# EAGLE board nintendac (EAGLE 7.7.0)
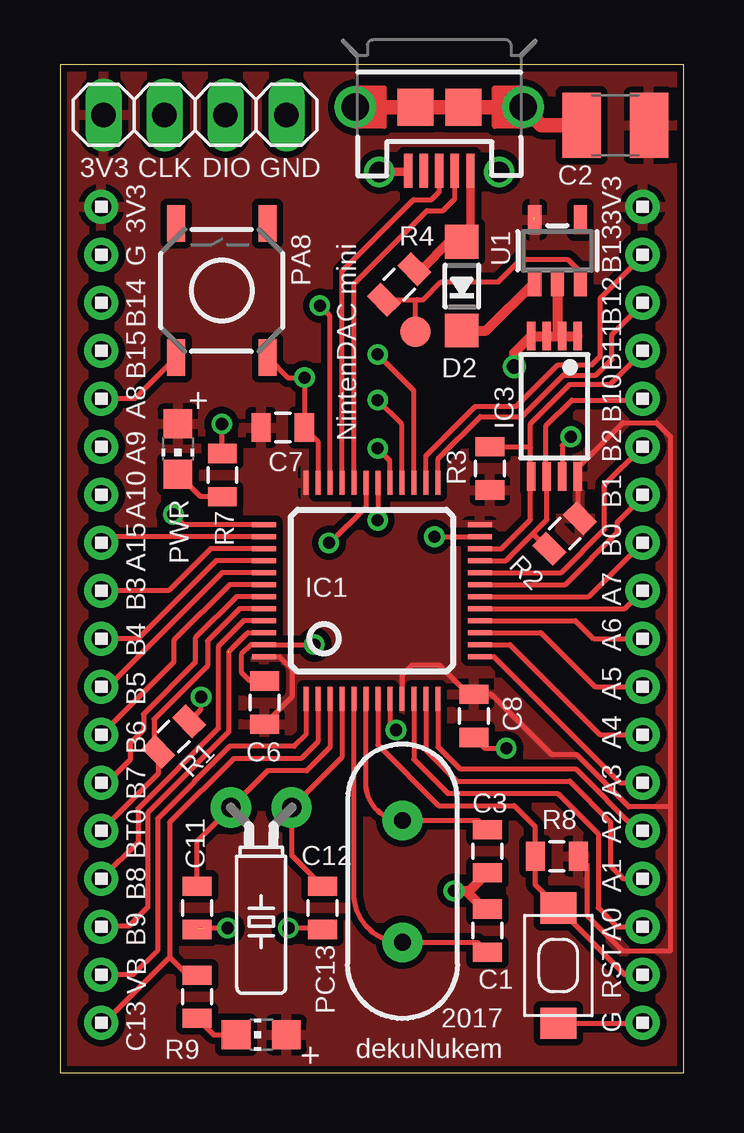
[diagram p0: board, top side]
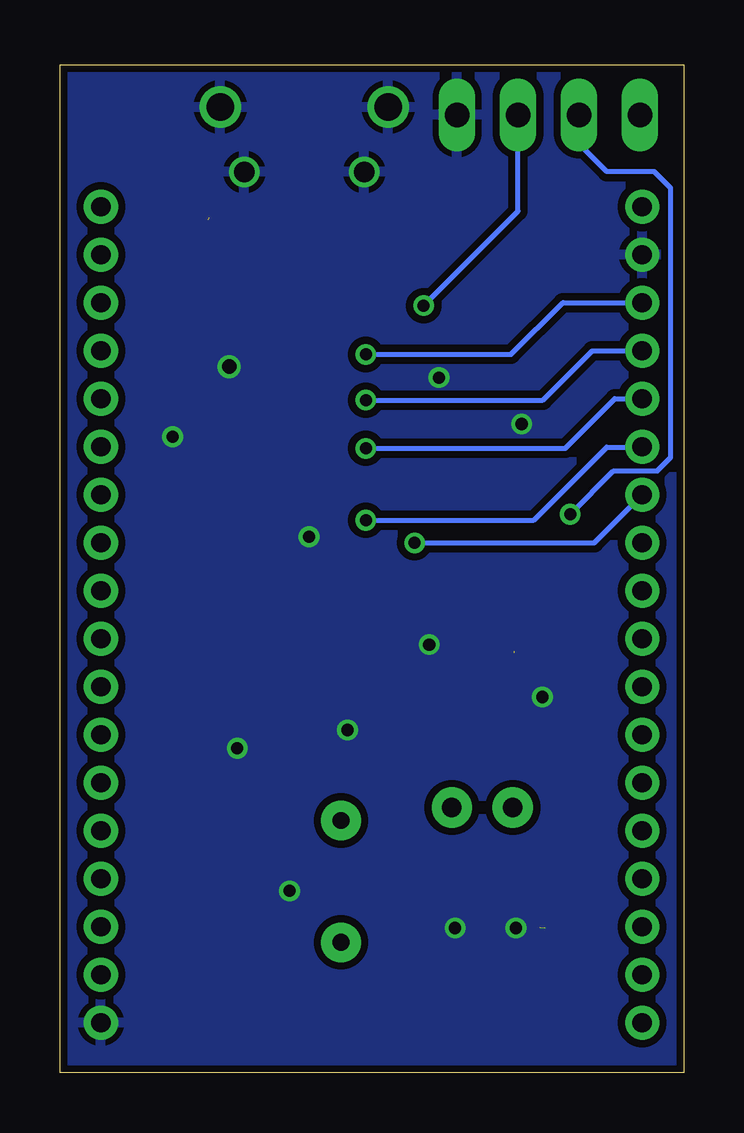
[diagram p1: board, bottom side, seen from below]

Size 26 x 42 mm. Coordinates in mm from the lower left corner, seen from the top.
Outline: 0,0 26,0 26,42 0,42 0,0
Copper layers (1*16): Top 0.035mm / dielectric 1.5mm / Bottom 0.035mm
Design rules "SparkFun-2-layer-TIGHT": minimum track width 7mil, minimum drill 15mil, track to track 7mil, track to pad 7mil, pad to pad 7mil, via to via 7mil, smd to smd 7mil, copper to edge 7mil, drill to drill 7mil, minimum pad ring 7mil, minimum via ring 7mil, stop-mask expansion 4mil, vias tented up to drill 25mil, thermal gap 10mil

## Footprints (pad centres in the part's own frame; a part is rotated, then mirrored left to right if it is on the bottom)
0805 = smd 0.8 x 1.2: 1 -0.9,0; 2 0.9,0
C1210 = smd 1.6 x 2.7: 1 -1.4,0; 2 1.4,0
SOD-123 = smd 1.4 x 1.4: A 1.85,0; C -1.85,0
TQFP48 = smd 0.2 x 1: 1 -2.75,-4.5; 2 -2.25,-4.5; 3 -1.75,-4.5; 4 -1.25,-4.5; 5 -0.75,-4.5; 6 -0.25,-4.5; 7 0.25,-4.5; 8 0.75,-4.5; 9 1.25,-4.5; 10 1.75,-4.5; 11 2.25,-4.5; 12 2.75,-4.5; 25 2.75,4.5; 26 2.25,4.5; 27 1.75,4.5; 28 1.25,4.5; 29 0.75,4.5; 30 0.25,4.5; 31 -0.25,4.5; 32 -0.75,4.5; 33 -1.25,4.5; 34 -1.75,4.5; 35 -2.25,4.5; 36 -2.75,4.5 | smd 1 x 0.2: 13 4.5,-2.75; 14 4.5,-2.25; 15 4.5,-1.75; 16 4.5,-1.25; 17 4.5,-0.75; 18 4.5,-0.25; 19 4.5,0.25; 20 4.5,0.75; 21 4.5,1.25; 22 4.5,1.75; 23 4.5,2.25; 24 4.5,2.75; 37 -4.5,2.75; 38 -4.5,2.25; 39 -4.5,1.75; 40 -4.5,1.25; 41 -4.5,0.75; 42 -4.5,0.25; 43 -4.5,-0.25; 44 -4.5,-0.75; 45 -4.5,-1.25; 46 -4.5,-1.75; 47 -4.5,-2.25; 48 -4.5,-2.75
TSSOP8 = smd 0.35 x 1.2: 1 -0.975,-2.925; 2 -0.325,-2.925; 3 0.325,-2.925; 4 0.975,-2.925; 5 0.975,2.925; 6 0.325,2.925; 7 -0.325,2.925; 8 -0.975,2.925
1X04 = drill 1.016 long: 1 -3.81,0; 2 -1.27,0; 3 1.27,0; 4 3.81,0
CHIP-LED0805 = smd 1.2 x 1.2: A 0,-1.05; C 0,1.05
KMR2 = smd 1.3 x 1.5: 1 2.4,0; 3 -2.4,0
TACTILE-SWITCH-SMD = smd 1.524 x 0.762: 1 -2.794,1.905; 2 2.794,1.905; 3 -2.794,-1.905; 4 2.794,-1.905
PAD.03X.05 = smd 1.27 x 1.27: P$1 0,0
SOT23-5 = smd 0.55 x 1.2: 1 -0.95,-1.3; 2 0,-1.3; 3 0.95,-1.3; 4 0.95,1.3; 5 -0.95,1.3
1X18 = drill 0.8 pad 1.422: 1 -9,0; 2 -7,0; 3 -5,0; 4 -3,0; 5 -1,0; 6 1,0; 7 3,0; 8 5,0; 9 7,0; 10 9,0; 11 11,0; 12 13,0; 13 15,0; 14 17,0; 15 19,0; 16 21,0; 17 23,0; 18 25,0
USB-MICROB = smd 0.35 x 1.4: D+ 0,2.65; D- -0.65,2.65; GND 1.3,2.65; ID 0.65,2.65; VBUS -1.3,2.65 | smd 1.5 x 1.55: P1 -1,0; P2 1,0 | drill 1.15 pad 1.422: P3 -3.5,0; P4 3.5,0 | drill 0.85 pad 1.27: P5 -2.5,2.7; P6 2.5,2.7
HC49US = drill 0.7 pad 1.651: 1 -2.54,0; 2 2.54,0
TC26HEZ = drill 0.813 pad 1.676: 1 -1.27,0; 2 1.27,0

## Placement (x,y rotation side)
C1  [0805]  17.82,5.92 90 top
C2  [C1210]  23.16,39.47 180 top
C3  [0805]  17.82,9.22 270 top
C6  [0805]  8.53,15.42 90 top
C7  [0805]  9.29,26.87 0 top
C8  [0805]  17.26,14.86 270 top
C11  [0805]  5.71,6.86 270 top
C12  [0805]  10.95,6.86 270 top
D2  MBR120  [SOD-123]  16.75,32.77 90 top
IC1  STM32F10XCXT6  [TQFP48]  13.01,20.08 0 top
IC3  24C64ST  [TSSOP8]  20.62,27.76 180 top
JP1  [1X04]  5.63,39.9 180 top
LED2  [CHIP-LED0805]  8.39,1.57 90 top
PWR  [CHIP-LED0805]  4.92,25.98 180 top
R1  [0805]  4.74,14 225 top
R2  [0805]  21.05,22.45 45 top
R3  [0805]  17.92,25.17 270 top
R4  [0805]  14.14,32.84 45 top
R7  [0805]  6.77,24.89 270 top
R8  [0805]  20.72,9.02 0 top
R9  [0805]  5.71,3.16 90 top
S1  SWITCH-MOMENTARY-2TURTLE  [KMR2]  20.78,4.46 90 top
S2  TAC_SWITCHSMD  [TACTILE-SWITCH-SMD]  6.75,32.59 90 top
TP1  TEST-POINT3X5  [PAD.03X.05]  14.82,30.86 0 top
U1  [SOT23-5]  20.74,34.24 0 top
U$1  1X18  [1X18]  1.73,27.08 270 top
U$2  1X18  [1X18]  24.29,27.08 270 top
X1  USB-MICROB  [USB-MICROB]  15.81,40.22 180 top
Y1  [HC49US]  14.28,7.97 270 top
Y2  [TC26HEZ]  8.39,11.04 180 top

## Library data of the parts
C1-C3 C6-C8 C11 C12 LED2 PWR Y1 Y2 = backplane
D2 = microbuilder
IC1 = stm32f072c8t6
IC3 = microchip; MPN: CAT24C64YI-GT3; OC_FARNELL: 1718133; OC_NEWARK: 08R5418
JP1 = pinhead
R1-R4 R7-R9 TP1 = SparkFun-Passives
S1 U1 = Adafruit Feather M0 Adalogger
S2 = SparkFun-Retired; PROD_ID: SWCH-08247
U$1 U$2 = headers(2mm)
X1 = backplane; PROD_ID: CONN-09505

## Nets
+3V3: C2.1 C6.1 C7.1 C8.1 IC1.9 IC1.24 IC1.36 IC1.48 IC3.8 JP1.4 LED2.A PWR.A R2.2 R3.2 R8.2 U1.5 U$1.1 U$2.1
GND: C1.2 C2.2 C3.2 C6.2 C7.2 C8.2 C11.2 C12.2 IC1.8 IC1.23 IC1.35 IC1.47 IC3.1 IC3.2 IC3.3 IC3.4 IC3.7 JP1.1 R1.1 R7.1 S1.3 S2.3 U1.2 U$1.2 U$2.18 X1.GND X1.P1 X1.P2 X1.P3 X1.P4 X1.P5 X1.P6
N$1: IC1.7 R8.1 S1.1 U$2.17
N$2: D2.A R4.2 X1.VBUS
N$3: IC1.44 R1.2 U$1.14
N$4: IC1.33 X1.D+
N$5: C1.1 IC1.5 Y1.2
N$6: C3.1 IC1.6 Y1.1
N$7: IC1.32 X1.D-
N$8: IC1.34 JP1.2
N$9: IC1.37 JP1.3
N$10: IC1.10 U$2.16
N$11: IC1.11 U$2.15
N$12: IC1.12 U$2.14
N$13: IC1.13 U$2.13
N$14: IC1.14 U$2.12
N$15: IC1.15 U$2.11
N$16: IC1.16 U$2.10
N$17: IC1.17 U$2.9
N$18: IC1.21 IC3.6 R2.1 U$2.5
N$19: IC1.22 IC3.5 R3.1 U$2.4
N$20: IC1.18 U$2.8
N$21: IC1.19 U$2.7
N$22: IC1.20 U$2.6
N$23: IC1.43 U$1.13
N$24: IC1.42 U$1.12
N$25: IC1.41 U$1.11
N$26: IC1.40 U$1.10
N$27: PWR.C R7.2
N$28: C11.1 IC1.3 Y2.2
N$29: C12.1 IC1.4 Y2.1
N$30: IC1.39 U$1.9
N$31: D2.C U1.1
N$32: IC1.2 R9.2 U$1.18
N$33: IC1.1 U$1.17
N$34: IC1.46 U$1.16
N$35: IC1.45 U$1.15
N$36: R4.1 TP1.P$1 U1.3
N$38: IC1.25 U$2.3
N$39: IC1.26 U$2.2
N$40: IC1.38 U$1.8
N$41: IC1.31 U$1.7
N$42: IC1.30 U$1.6
N$43: IC1.29 S2.1 U$1.5
N$44: IC1.27 U$1.3
N$45: IC1.28 U$1.4
N$65: LED2.C R9.1

## Tracks (layer width: path | path; a pad name or v marks a point on that pad's centre or on a via)
+3V3  (1 unrouted)
  Top 0.203: 8.53,17.31 IC1.48 9.16,17.33 9.67,16.82 9.67,15.66 C6.1 | IC1.9 14.27,16.56 14.67,16.97 15.81,16.97 17.02,15.76 C8.1 17.99,15.76 20.51,13.23 21.55,13.23 23.71,11.07 25.45,11.07 | R2.2 21.59,23.18 IC3.8 21.59,25.2 23.47,27.08 24.87,27.08 25.45,26.49 25.45,11.07 | R8.2 21.97,8.66 21.97,6.55 23.44,5.08 25.45,5.08 25.45,11.07
  Top 0.406: 19.78,35.41 19.78,35.61
  pour Top (isolate 0.279): 0,41.91 25.98,42 25.98,0 0,0
GND  (via drill 0.51, 0.6)  (1 unrouted)
  Top 0.203: C6.2 8.51,16.33 7.92,16.33 7.56,16.69 7.56,17.42 7.96,17.83 IC1.47 v10.6,17.83 v10.61,17.83 | IC1.35 10.76,26.3 C7.2 10.2,26.89 v10.2,28.96 9.49,28.96 S2.3 | IC1.8 13.76,14.53 v14.01,14.28 | C8.2 17.71,13.51 v18.61,13.51 | v15.61,22.33 IC1.23 | v6.75,27.03 6.75,25.82 R7.1 | S1.3 24.28,2.06 U$2.18 | 6,6.03 6.01,6.02 | C12.2 10.89,6.02 v9.53,6.02 | v6.99,6.02 5.78,6.02 C11.2 | v21.3,26.49 20.94,26.13 IC3.7 | R1.1 5.88,15.14 v5.88,15.65
  Top 0.356: X1.P6 14.46,37.52 X1.GND
  Top 0.406: v16.42,7.57 16.93,7.57 | 16.93,7.57 17.07,7.57 C3.2 | C1.2 17.68,6.82 16.93,7.57 | IC3.2 IC3.3 IC3.4 18.94,29.99 v18.94,29.41 | IC3.2 IC3.1 | U1.2 20.74,30.89 IC3.2
  Top 0.61: X1.P4 X1.P2 X1.P1 X1.P3 20.07,39.47 C2.2
  pour Bottom (isolate 0.305): 0,41.91 25.98,42 25.98,0 0,0
N$1
  Top 0.203: IC1.7 13.26,13.65 15.79,11.12 18.94,11.12 19.8,10.26 19.8,9.03 | 19.8,9.03 R8.1 | 19.8,9.03 19.8,7.83 S1.1 23.56,4.08 U$2.17
N$2
  Top 0.356: R4.2 15.08,33.48 16.22,34.62 D2.A 17.11,34.98 X1.VBUS
N$3
  Top 0.203: U$1.14 4.1,12.46 R1.2 3.93,13.54 3.93,14.72 6.15,16.94 6.15,17.98 7.49,19.33 IC1.44
N$4
  Top 0.203: IC1.33 11.76,33.38 14.75,36.37 15.49,36.37 15.81,36.69 X1.D+
N$5
  Top 0.203: 17.8,5.04 C1.1 17.41,5.42 Y1.2 arc-90 12.26,7.45 IC1.5
N$6
  Top 0.203: C3.1 17.44,10.51 Y1.1 arc-90 12.76,12.03 IC1.6
N$7
  Top 0.203: IC1.32 12.26,32.87 15.31,35.92 15.98,35.92 16.46,36.4 X1.D-
N$8  (via drill 0.5)
  Top 0.203: IC1.34 11.26,31.53 v10.84,31.95
  Bottom 0.203: v10.84,31.95 6.9,35.89 JP1.2
N$9  (via drill 0.51 pad 0.51)
  Top 0.203: IC1.37 5.17,22.83 v4.72,23.27
  Bottom 0.203: JP1.3 4.37,38.71 3.2,37.54 1.22,37.54 0.53,36.85 0.53,25.63 1.09,25.07 2.92,25.07 v4.72,23.27
N$10
  Top 0.203: IC1.10 14.76,13.04 16.17,11.63 20.75,11.63 22.44,9.94 22.44,6.86 23.23,6.08 U$2.16
N$11
  Top 0.203: IC1.11 15.26,13.43 16.55,12.14 21.25,12.14 22.95,10.44 22.95,8.61 23.49,8.08 U$2.15
N$12
  Top 0.203: IC1.12 15.76,13.57 16.68,12.65 21.5,12.65 24.08,10.08 U$2.14
N$13
  Top 0.203: IC1.13 18.1,17.33 23.35,12.08 U$2.13
N$14
  Top 0.203: IC1.14 18.77,17.83 22.52,14.08 U$2.12
N$15
  Top 0.203: IC1.15 20.04,18.33 22.29,16.08 U$2.11
N$16
  Top 0.203: IC1.16 21.5,18.83 22.25,18.08 U$2.10
N$17
  Top 0.203: IC1.17 23.54,19.33 U$2.9
N$18
  Top 0.203: IC1.21 18.6,21.33 19.72,22.45 | 19.72,22.45 20.31,23.04 20.31,24.82 IC3.6 20.27,24.86 20.27,26.95 21.34,28.02 24.23,28.02 U$2.5 | 19.72,22.45 20.35,21.82 R2.1
N$19
  Top 0.203: IC1.22 18.41,21.83 19.62,23.04 19.62,24.82 IC3.5 19.61,24.86 19.61,26.04 | 19.61,26.04 19.61,27.03 21.26,28.68 22.95,28.68 24.29,30.02 U$2.4 | R3.1 19.58,26.07 19.61,26.04
N$20
  Top 0.203: IC1.18 22.04,19.83 U$2.8
N$21
  Top 0.203: IC1.19 21.06,20.33 23.24,22.5 23.24,22.94 24.29,23.99 U$2.7
N$22
  Top 0.203: IC1.20 20.9,20.83 22.71,22.63 22.71,24.49 U$2.6
N$23
  Top 0.203: IC1.43 7.36,19.83 5.64,18.11 5.64,17.09 3.48,14.94 3.48,14.28 2.92,13.72 2.92,13.03 1.97,12.08 U$1.13
N$24
  Top 0.203: IC1.42 7.07,20.33 4.75,18.01 4.75,17.1 U$1.12
N$25
  Top 0.203: IC1.41 6.77,20.83 2.02,16.08 U$1.11
N$26
  Top 0.203: IC1.40 6.51,21.33 3.26,18.08 U$1.10
N$27
  Top 0.203: R7.2 5.86,23.99 PWR.C
N$28
  Top 0.203: C11.1 5.71,9.63 Y2.2 8.65,12.57 10.29,12.57 11.26,13.54 IC1.3
N$29
  Top 0.203: C12.1 9.66,9.04 Y2.1 11.76,13.14 IC1.4
N$30
  Top 0.203: IC1.39 6.27,21.83 4.52,20.08 U$1.9
N$31
  Top 0.406: D2.C 17.77,30.92 U1.1
N$32
  Top 0.203: IC1.2 10.76,13.79 10.05,13.08 7.23,13.08 4.57,10.42 4.57,4.8 | 4.57,4.8 1.85,2.08 U$1.18 | R9.2 5.31,4.06 4.57,4.8
N$33
  Top 0.203: IC1.1 10.26,14.08 9.77,13.59 7.08,13.59 4.06,10.58 4.06,5.08 3.06,4.08 U$1.17
N$34  (1 unrouted)
  Top 0.203: 7.05,17.5 7.05,14.21 3.66,10.82 3.66,6.88 2.87,6.1 1.75,6.1 U$1.16 | 7.05,17.55 7.83,18.33 IC1.46
N$35
  Top 0.203: IC1.45 7.67,18.83 6.59,17.75 6.59,14.34 3.25,11 3.25,9.6 U$1.15
N$36
  Top 0.203: R4.1 14.9,32.21 | 14.9,32.21 15.15,32.21 15.89,32.94 18.29,32.94 19.23,33.88 21.17,33.88 21.69,33.37 U1.3 21.63,33 | TP1.P$1 14.82,32.13 14.9,32.21
N$38
  Top 0.203: IC1.25 15.76,25.57 17.53,27.33 19.25,27.33 20.98,29.06 22.35,29.06 23.01,29.72 23.01,30.74 24.29,32.02 U$2.3
N$39
  Top 0.203: U$2.2 24.29,34.02 22.53,32.26 22.53,29.84 22.17,29.49 20.75,29.49 19.02,27.76 17.32,27.76 15.26,25.7 IC1.26
N$40
  Top 0.203: IC1.38 1.98,22.33 U$1.8
N$41  (via drill 0.5)
  Top 0.203: IC1.31 12.76,23.56 11.27,22.07 v11.22,22.07
  Bottom 0.203: v11.22,22.07 3.73,22.07 U$1.7
N$42  (via drill 0.5)
  Top 0.203: IC1.30 13.26,23.02 v13.25,23.01
  Bottom 0.203: v13.25,23.01 6.25,23.01 3.2,26.06 1.74,26.06 U$1.6
N$43  (via drill 0.5)
  Top 0.203: IC1.29 13.76,25.5 v13.25,26.01 | S2.1 3.12,28.08 U$1.5
  Bottom 0.203: v13.25,26.01 4.94,26.01 2.87,28.08 U$1.5
N$44  (via drill 0.5)
  Top 0.203: IC1.27 14.76,28.41 v13.25,29.92
  Bottom 0.203: v13.25,29.92 7.19,29.92 5.03,32.08 U$1.3
N$45  (via drill 0.5)
  Top 0.203: IC1.28 14.26,27.01 v13.25,28.02
  Bottom 0.203: v13.25,28.02 5.87,28.02 3.81,30.07 U$1.4
N$65
  Top 0.203: R9.1 6.4,1.57 LED2.C

## Text on the board
tNames: 3V3 | 3V3 | CLK | DIO | GND | 3V3 | G | B14 | PA8 | B13 | B15 | B12 | A8 | B11 | A9 | B10 | NintenDAC mini | A10 | B2 | PWR | B1 | A15 | B3 | B0 | B4 | A7 | A6 | B5 | A5 | B6 | B7 | A4 | BT0 | A3 | A2 | B8 | A1 | B9 | VB | PC13 | A0 | C13 | RST | 2017 | G | dekuNukem